# Altium PCB BM22192DA06_PCB.PcbDoc
Units mm, origin at the board's own origin, x right, y up, seen from the top; angles counter-clockwise.
Board outline 23.04 x 35.03 mm, 2 copper layers (Top Layer, Bottom Layer); 73 components, 45 nets, 223 pads, 62 vias.
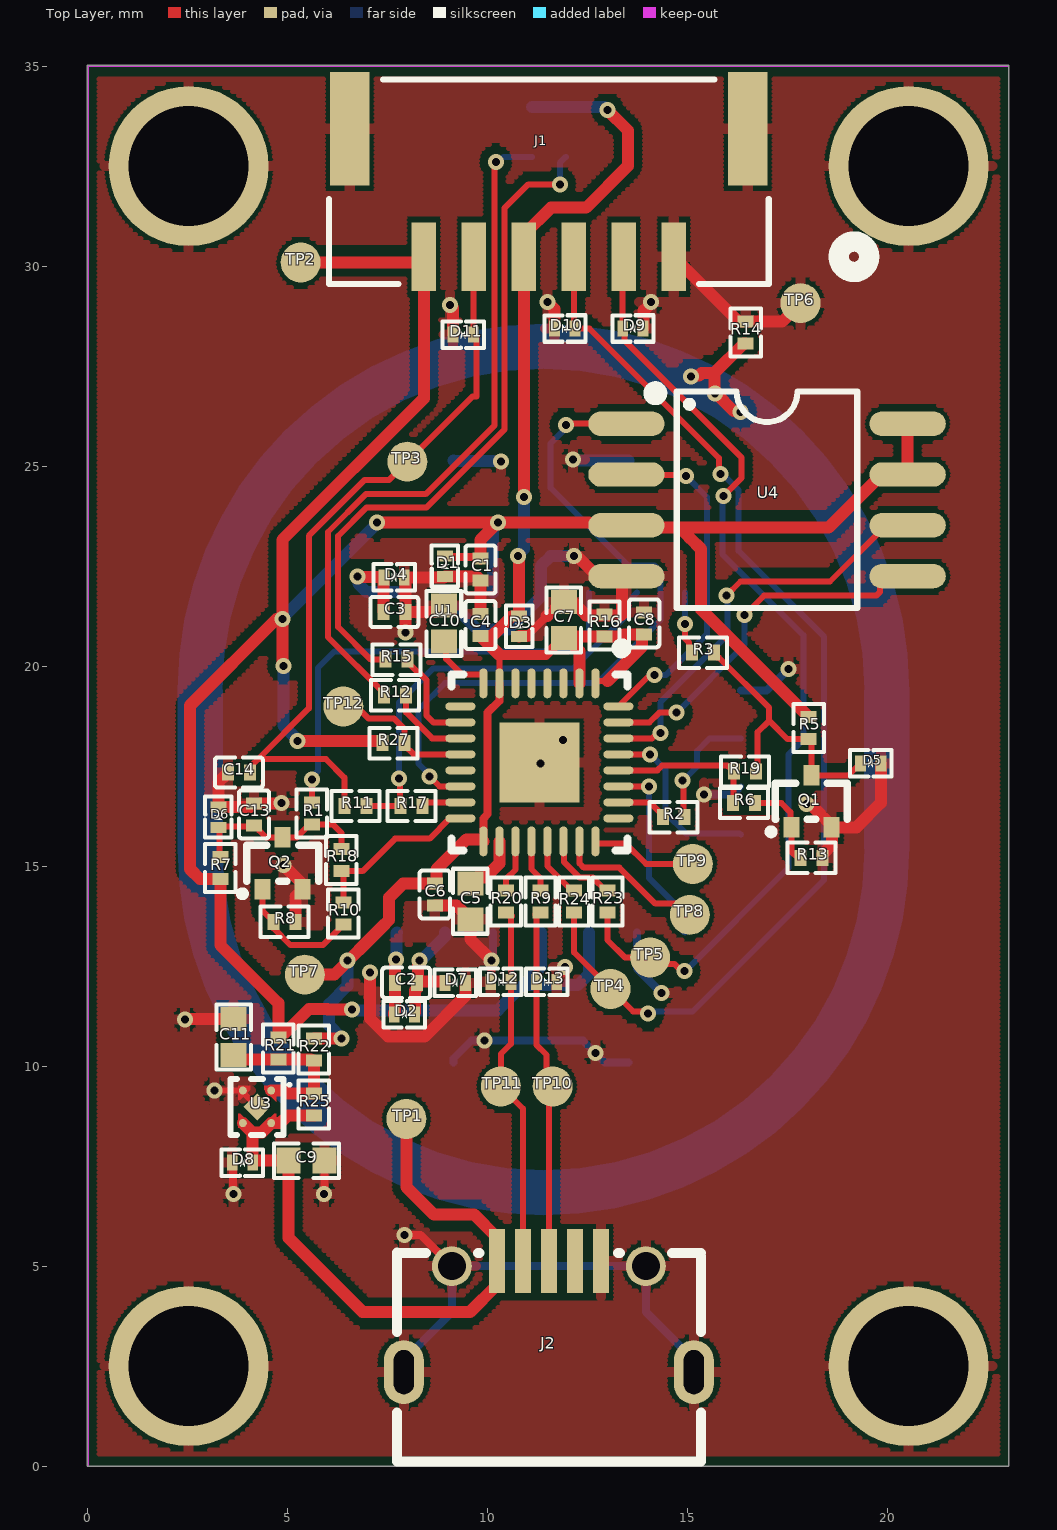
[diagram p0: Top Layer view]
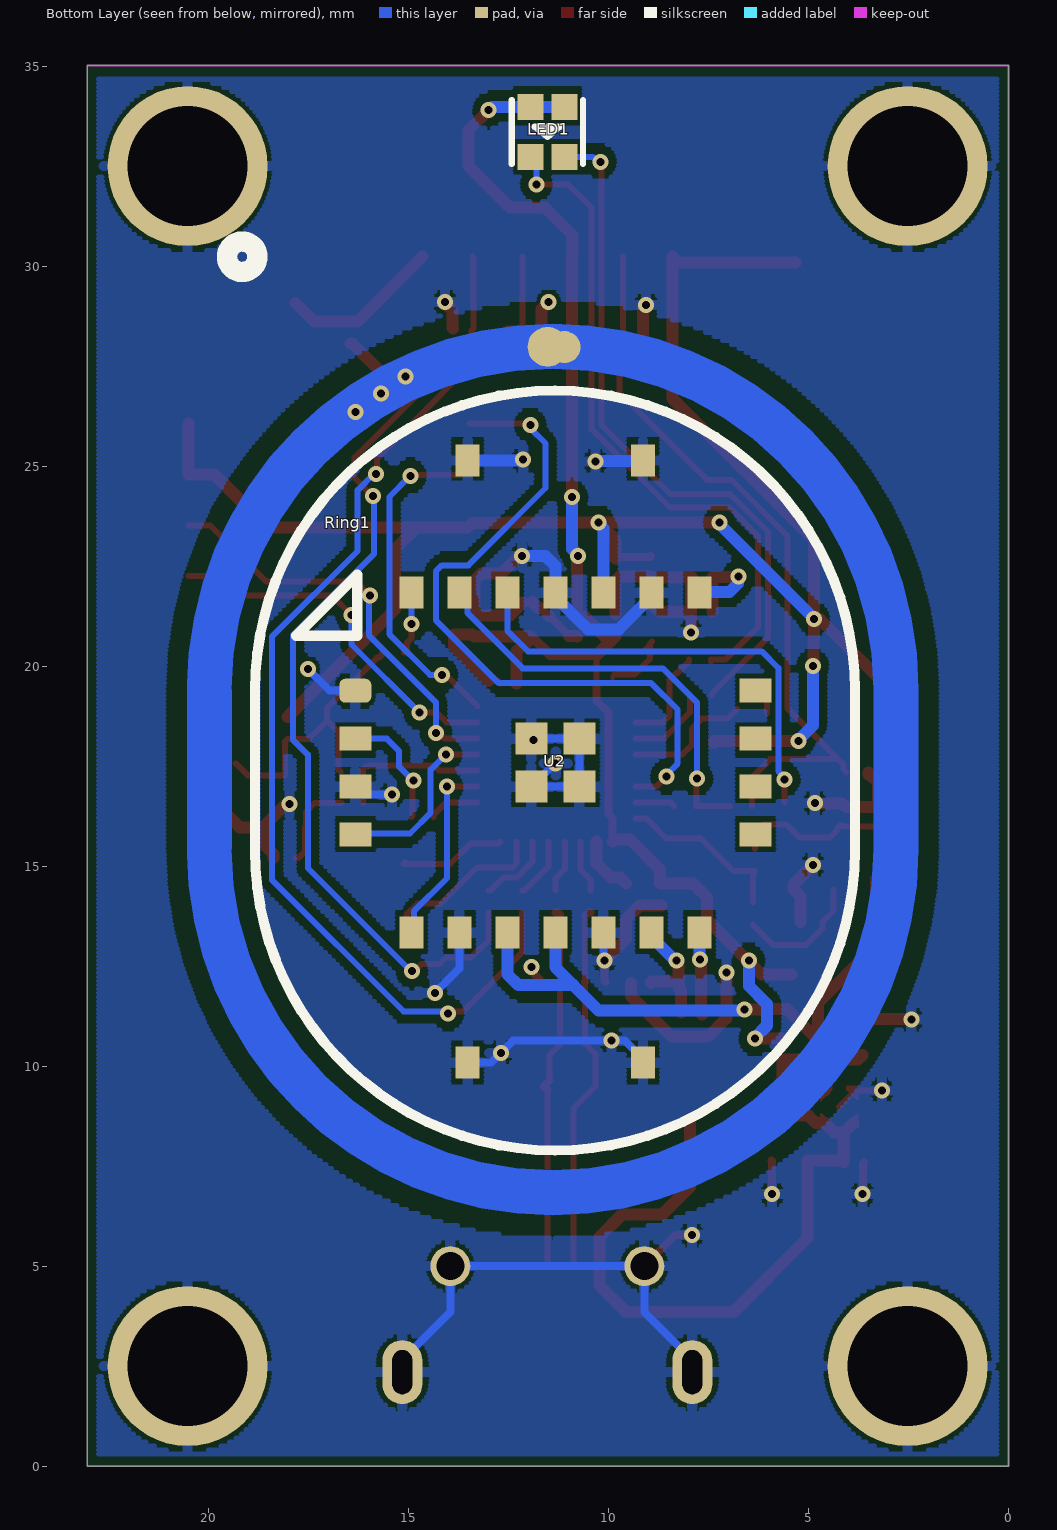
[diagram p1: Bottom Layer view, seen from below]

## Layer stack, top to bottom
Top Solder: solder mask 0.0102, Solder Resist, Dk 3.5
Top Layer: signal copper 0.0356
Dielectric 1: dielectric 0.32, FR-4, Dk 4.8
Bottom Layer: signal copper 0.0356
Bottom Solder: solder mask 0.0102, Solder Resist, Dk 3.5

## Board outline
0,0.001 0,35.028 23.038,35.028 23.038,0.001

## Design rules (kind name [scope] priority, off if disabled: settings)
BoardOutlineClearance [All] p1: gap=0 ignorepadtopadclearanceinfootprint=FALSE
Clearance Clearance_1 [All] p1: gap=0.1 ignorepadtopadclearanceinfootprint=FALSE except(0.2: Arc-Fill Arc-Poly Arc-Region Track-Fill Track-Poly Track-Region Via-Fill Via-Poly Via-Region Fill-Fill Fill-Poly Fill-Region Poly-Poly Poly-Region Region-Region)
Clearance "POUR POLYGON" [InNet('ESD_GND') vs InNet('GND')] p2: gap=0.5 ignorepadtopadclearanceinfootprint=FALSE
HoleSize [All] p1: absolutevalues=TRUE maxlimit=3 minlimit=0.025 maxpercent=80.000 minpercent=20.000
HoleToHoleClearance [All] p1: gap=0 allowstackedmicrovias=TRUE
MinimumSolderMaskSliver [All] p1: minsoldermaskwidth=0
PolygonConnect [All] p1: connectstyle=Relief reliefconductorwidth=0.254 reliefentries=4 polygonreliefangle="90 Angle" airgapwidth=0.1
RoutingCorners [All] p1: cornerstyle=45-Degree minsetback=1 maxsetback=1
RoutingVias [All] p1: holewidth=0.711 width=1.27 viastyle="Through Hole" minholewidth=0.711 minwidth=1.27 maxholewidth=0.711 maxwidth=1.27
SilkToSilkClearance [All] p1: silktosilkclearance=0
SilkToSolderMaskClearance [IsPad] p1: minsilkscreentomaskgap=0 clearancetoexposedcopper=TRUE
SolderMaskExpansion [All] p1: expansion=0.102 istentingtop=FALSE
Width [All] p1: maxlimit=1 minlimit=0.1 preferedwidth=0.15
24 further rules are at their usual default settings.

## Components (designator, comment, footprint, x,y, rotation, side; value= is the part's Value field where it differs from the comment)
C1 "2.2uF" C0201 9.83,22.424 r90 top
C2 "2.2uF" C0201 7.971,12.09 r0 top
C3 "2.2nF" C0201 7.675,21.361 r180 top
C4 "0.1uF" C0201 9.83,21.036 r270 top
C5 "1uF" C0402 9.576,14.13 r90 top
C6 "0.1uF" C0201 8.687,14.3 r90 top
C7 "4.7uF" C0402 11.913,21.158 r270 top
C8 "0.1uF" C0201 13.919,21.078 r270 top
C9 "1uF" C0402 5.479,7.645 r180 top
C10 "1uF" C0402 8.915,21.075 r270 top
C11 "1uF" C0402 3.658,10.737 r270 top
C13 "47nF" C0201 4.166,16.302 r270 top
C14 "NC" C0201 3.789,17.348 r0 top
D1 "5V" D0201-BI_A 8.94,22.509 r270 top
D2 "5V" D0201-BI_A 7.923,11.303 r0 top
D3 "TVS/5V" D0201-BI_A 10.795,21.004 r90 top
D4 "12V" D0201-BI_A 7.673,22.225 r180 top
D5 "5V" D0201-BI_A 19.588,17.577 r180 top
D6 "5V" D0201-BI_A 3.276,16.235 r270 top
D7 "12V" D0201-BI_A 9.199,12.091 r180 top
D8 "RSFK9D3NT" D0201-BI_A 3.875,7.594 r0 top
D9 "RSFK9D3NT" D0201-BI_A 13.642,28.448 r180 top
D10 "RSFK9D3NT" D0201-BI_A 11.94,28.448 r180 top
D11 "RSFK9D3NT" D0201-BI_A 9.4,28.296 r180 top
D12 "RSFK9D3NT" D0201-BI_A 10.336,12.115 r0 top
D13 "RSFK9D3NT" D0201-BI_A 11.485,12.116 r180 top
J1 "SM06B-GHS-TB(LF)(SN)" CONN_SM06B-GHS-TB_JST 11.536,32.119 r180 top locked
J2 "MICRO XNJ ZB" MICRO-USB-SMD_MICRO-XNJ-ZB 11.539,2.967 r270 top locked
LED1 "NCD1615RC1" LED-SMD_4P-L1.6-W1.5-TL-1 11.538,33.366 r90 bottom locked
Q1 "MMBT3904T" SOT-523-3_L1.6-W0.8-P1.00-LS1.6-BR 18.061,16.597 r270 top
Q2 "MMBT3904T" SOT-523-3_L1.6-W0.8-P1.00-LS1.6-BR 4.844,15.047 r270 top
R1 "Res1" R0201 5.613,16.328 r270 top value=1K
R2 "Res1" R0201 14.66,16.231 r180 top value=33R
R3 "Res1" R0201 15.392,20.345 r0 top value=1K
R5 "Res1" R0201 18.034,18.461 r270 top value=10K
R6 "Res1" R0201 16.413,16.586 r180 top value=2.2K
R7 "Res1" R0201 3.327,14.956 r90 top value=10K
R8 "Res1" R0201 4.932,13.614 r0 top value=10K
R9 "Res1" R0201 11.328,14.127 r90 top value=22R
R10 "Res1" R0201 6.401,13.818 r90 top value=2.2K
R11 "Res1" R0201 6.701,16.51 r0 top value=330R
R12 "Res1" R0201 7.696,19.279 r180 top value=100R
R13 "Res1" R0201 18.106,15.215 r0 top value=10K
R14 "Res1" R0201 16.459,28.346 r270 top value=0R
R15 "Res1" R0201 7.726,20.168 r0 top value=100R
R16 "Res1" R0201 12.929,21.027 r90 top value=10K
R17 "Res1" R0201 8.098,16.51 r180 top value=330R
R18 "Res1" R0201 6.35,15.159 r270 top value=NC
R19 "Res1" R0201 16.438,17.374 r180 top value=NC
R20 "Res1" R0201 10.465,14.118 r90 top value=22R
R21 "Res1" R0201 4.775,10.444 r90 top value=NC
R22 "Res1" R0201 5.664,10.419 r90 top value=NC
R23 "Res1" R0201 13.005,14.127 r90 top value=22R
R24 "Res1" R0201 12.167,14.118 r90 top value=22R
R25 "Res1" R0201 5.664,9.047 r90 top value=NC
R27 "Res1" R0201 7.65,18.085 r180 top value=10K
Ring1 "RING" 金属环 11.405,17.426 r0 top locked
TP1 "TestPoint" TestPoint 7.976,8.687 r180 top
TP2 "TestPoint" TestPoint 5.334,30.099 r270 top
TP3 "TestPoint" TestPoint 8.001,25.121 r270 top
TP4 "TestPoint" TestPoint 13.081,11.938 r90 top
TP5 "TestPoint" TestPoint 14.072,12.725 r90 top
TP6 "TestPoint" TestPoint 17.831,29.083 r90 top
TP7 "TestPoint" TestPoint 5.436,12.294 r270 top
TP8 "TestPoint" TestPoint 15.062,13.792 r270 top
TP9 "TestPoint" TestPoint 15.138,15.062 r270 top
TP10 "TestPoint" TestPoint 11.633,9.5 r270 top
TP11 "TestPoint" TestPoint 10.338,9.5 r270 top
TP12 "TestPoint" TestPoint 6.401,18.999 r90 top
U1 "CCM4201S" QFN40P400X400X85_HS-33N 11.303,17.602 r270 top locked
U2 "BF82192C" BF82192c 11.338,17.593 r0 top locked
U3 "ME6230C33U4AG" FBP4L_L1.0-W1.0-P0.65-BL-EP 4.293,8.992 r180 top
U4 "ZB25VQ32BSIG" SOIJ-8_L5.3-W5.3-P1.27-LS7.9-BL 16.993,24.181 r270 top locked

## Footprints (in the part's own frame and the unit in brackets; to place one, negate y for a bottom-side part, rotate by r counter-clockwise, add the part's x,y. Pads: shape width x height; smd on the part's side, far side on the other; paste and mask are expansions set on the pad)
BF82192c [mm] "FP_MODOULE"
  rrect50% 0.8x0.6 smd far side: 1(5,1.8)
  rect 0.8x0.6 smd far side: 2(5,0.6) 3(5,-0.6) 4(5,-1.8) 12(-5,-1.8) 13(-5,-0.6) 14(-5,0.6) 15(-5,1.8)
  rect 0.6x0.8 smd far side: 5(3.6,-4.25) 6(2.4,-4.25) 7(1.2,-4.25) 8(0,-4.25) 9(-1.2,-4.25) 10(-2.4,-4.25) 11(-3.6,-4.25) 16(-3.6,4.25) 17(-2.4,4.25) 18(-1.2,4.25) 19(0,4.25) 20(1.2,4.25) 21(2.4,4.25) 22(3.6,4.25) 27(-2.19,7.56) 28(2.19,7.56) 29(2.19,-7.5) 30(-2.19,-7.5)
  rect 0.8x0.8 smd far side: 23(0.6,0.6) 24(0.6,-0.6) 25(-0.6,-0.6) 26(-0.6,0.6)
C0201 [mm]
  rect 0.3x0.4 smd paste+0 mask+0.102: 1(-0.275,0) 2(0.275,0)
  silkscreen extent -0.6,-0.38 0.6,0.38
C0402 [mm]
  rect 0.6x0.65 smd paste+0 mask+0.051: 1(-0.45,0) 2(0.45,0)
  silkscreen extent -0.81,-0.43 0.81,0.43
CONN_SM06B-GHS-TB_JST [mil]
  rect 24x67 smd paste+0 mask+0: 1(-123.03,73.85) 2(-73.82,73.85) 3(-24.61,73.85) 4(24.61,73.85) 5(73.82,73.85) 6(123.03,73.85)
  rect 39x112 smd paste+0 mask+0: 7(-195.87,-52.14) 8(195.87,-52.14)
  silkscreen extent -315,-101 216,101
D0201-BI_A [mm]
  rect 0.27x0.4 smd paste+0 mask+0.05: 1(-0.252,0) 2(0.258,0)
  silkscreen extent -0.52,-0.33 0.52,0.33
FBP4L_L1.0-W1.0-P0.65-BL-EP [mm]
  round 0.2 smd mask+0: 1(-0.305,-0.406) 2(0.406,-0.406) 3(0.406,0.406) 4(-0.305,0.406)
  rect 0.48x0.48 smd rot 45 paste+0 mask+0.051: 5(0.048,0)
  Top Layer region: 0.523,-0.175 0.523,-0.525 0.223,-0.525 0.223,-0.525 0.223,-0.425 0.473,-0.175
  Top Layer region: -0.427,0.175 -0.427,0.525 -0.127,0.525 -0.127,0.475 -0.127,0.425 -0.377,0.175
  Top Layer region: 0.223,0.525 0.523,0.525 0.523,0.175 0.523,0.175 0.473,0.175 0.223,0.425
  Top Layer region: -0.127,-0.525 -0.427,-0.525 -0.427,-0.125 -0.427,-0.125 -0.127,-0.425
  silkscreen extent -0.78,-0.7 0.71,0.7
LED-SMD_4P-L1.6-W1.5-TL-1 [mm]
  rect 0.65x0.65 smd paste+0 mask+0.051: 1(-0.625,0.425) 2(0.625,0.425) 3(-0.625,-0.425) 4(0.625,-0.425)
  silkscreen extent -0.8,-0.89 0.8,0.89
MICRO-USB-SMD_MICRO-XNJ-ZB [mm]
  rect 1.6x0.4 smd paste-100 mask+0.051: 1(-2.167,-1.3) 2(-2.167,-0.65) 3(-2.167,0) 4(-2.167,0.65) 5(-2.167,1.3)
  round 1 hole 0.7 paste+0 mask+0.051: 6(-2.042,2.425) 6(-2.042,-2.425)
  oval 1.6x1 hole 0.5 slot 1.1 at 0 deg paste+0 mask+0.051: 6(0.608,3.625) 6(0.608,-3.625)
  silkscreen extent -2.38,-3.8 2.84,3.8
QFN40P400X400X85_HS-33N [mm] "QFN, 32-Leads, Body 4.00x4.00mm, Pitch 0.40mm, Thermal Pad 2.80x2.80mm, IPC Medium Density"
  oval 0.75x0.2 smd: 1(-1.975,1.4) 2(-1.975,1) 3(-1.975,0.6) 4(-1.975,0.2) 5(-1.975,-0.2) 6(-1.975,-0.6) 7(-1.975,-1) 8(-1.975,-1.4) 17(1.975,-1.4) 18(1.975,-1) 19(1.975,-0.6) 20(1.975,-0.2) 21(1.975,0.2) 22(1.975,0.6) 23(1.975,1) 24(1.975,1.4)
  oval 0.2x0.75 smd: 9(-1.4,-1.975) 10(-1,-1.975) 11(-0.6,-1.975) 12(-0.2,-1.975) 13(0.2,-1.975) 14(0.6,-1.975) 15(1,-1.975) 16(1.4,-1.975) 25(1.4,1.975) 26(1,1.975) 27(0.6,1.975) 28(0.2,1.975) 29(-0.2,1.975) 30(-0.6,1.975) 31(-1,1.975) 32(-1.4,1.975)
  rect 2x2 smd: 33(0,0)
  silkscreen extent -2.97,-2.2 2.2,2.2, body extent -2.05,-2.05 2.05,2.05, height 0.85
R0201 [mm]
  rect 0.3x0.4 smd paste+0 mask+0.102: 1(-0.275,0) 2(0.275,0)
  silkscreen extent -0.6,-0.38 0.6,0.38
SOIJ-8_L5.3-W5.3-P1.27-LS7.9-BL [mm]
  oval 0.609x1.907 smd paste+0 mask+0.051: 1(-1.888,-3.515) 2(-0.618,-3.515) 3(0.652,-3.515) 4(1.922,-3.515) 5(1.922,3.515) 6(0.652,3.515) 7(-0.618,3.515) 8(-1.888,3.515)
  silkscreen extent -2.8,-2.94 2.72,2.26
SOT-523-3_L1.6-W0.8-P1.00-LS1.6-BR [mm]
  rect 0.51x0.4 smd paste+0 mask+0.051: 1(0.62,-0.459) 2(0.62,0.541) 3(-0.68,0.041)
  silkscreen extent -0.48,-1.04 0.8,0.94
TestPoint [mm] "TP"
  round 1 smd: 1(0,0)
金属环 [mm]
  round 0.8 smd far side: 1(-0.295,10.559)
  round 1 smd far side mask+0: 1(0.127,10.566)
  Bottom Layer region: 0.896,-11.098 1.784,-10.966 2.654,-10.748 3.498,-10.446 4.309,-10.062 5.079,-9.601 5.8,-9.067 6.464,-8.464 7.067,-7.8 7.601,-7.079 8.062,-6.309 8.446,-5.498 8.748,-4.654 8.966,-3.784 9.098,-2.896 9.136,-2.126 9.139,-2 9.139,-2 9.139,-1.873 9.139,1.873 9.139,2 9.139,2 9.136,2.126 9.098,2.896 8.966,3.784 8.748,4.654 8.446,5.498 8.062,6.309 7.601,7.079 7.067,7.8 6.464,8.464 5.8,9.067 5.079,9.601 4.309,10.062 3.498,10.446 2.654,10.748 1.784,10.966 0.896,11.098 0,11.142 -0.896,11.098 -1.784,10.966 -2.654,10.748 -3.498,10.446 -4.309,10.062 -5.079,9.601 -5.8,9.067 -6.464,8.464 -7.067,7.8 -7.601,7.079 -8.062,6.309 -8.446,5.498 -8.748,4.654 -8.966,3.784 -9.098,2.896 -9.142,2.006 -9.139,2 -9.139,-2 -9.142,-2.006 -9.098,-2.896 -8.966,-3.784 -8.748,-4.654 -8.446,-5.498 -8.062,-6.309 -7.601,-7.079 -7.067,-7.8 -6.464,-8.464 -5.8,-9.067 -5.079,-9.601 -4.309,-10.062 -3.498,-10.446 -2.654,-10.748 -1.784,-10.966 -0.896,-11.098 0,-11.142 hole: 0,-10.019 -0.898,-9.969 -1.784,-9.818 -2.648,-9.569 -3.479,-9.225 -4.266,-8.79 -5,-8.269 -5.67,-7.67 -6.269,-7 -6.79,-6.266 -7.225,-5.479 -7.569,-4.648 -7.818,-3.784 -7.969,-2.898 -8.019,-2 -8.011,-2 -8.011,2 -8.019,2 -7.969,2.898 -7.818,3.784 -7.569,4.648 -7.225,5.479 -6.79,6.266 -6.269,7 -5.67,7.67 -5,8.269 -4.266,8.79 -3.479,9.225 -2.648,9.569 -1.784,9.818 -0.898,9.969 0,10.019 0.898,9.969 1.784,9.818 2.648,9.569 3.479,9.225 4.266,8.79 5,8.269 5.67,7.67 6.269,7 6.79,6.266 7.225,5.479 7.569,4.648 7.818,3.784 7.969,2.898 8.019,2 8.011,2 8.011,-2 8.019,-2 7.969,-2.898 7.818,-3.784 7.569,-4.648 7.225,-5.479 6.79,-6.266 6.269,-7 5.67,-7.67 5,-8.269 4.266,-8.79 3.479,-9.225 2.648,-9.569 1.784,-9.818 0.898,-9.969

## Part data
C1 C2 C3 C4 C6 C8 C13 C14: library part C0201, "CAP"
C5 C7 C9 C10 C11: library part C0201, Parameter 1=1uF
D1 D2 D3 D4 D5 D6 D7: library part RSFK9D3NT, "TVS"
D8: "TVS"
J1: library part SM06B-GHS-TBLFSN, "Description"
LED1: "LED"
Q1 Q2: "NPN triode"
R1 R2 R3 R5 R6 R7 R8 R9 R10 R11 R12 R13 R14 R15 R16 R17 R18 R19 R20 R21 R22 R23 R24 R25 R27: "Resistor", LatestRevisionDate=17-Jul-2002, LatestRevisionNote="Re-released for DXP Platform.", PackageDescription="Axial Device, Thru-Hole; 2 Leads; 0.3 in Pin Spacing", PackageReference=AXIAL-0.3, Published=8-Jun-2000, Publisher="Altium Limited"
Ring1: "Metal Ring"
U3: "LDO"

## Free pads (board coordinates)
  round 4 hole 3: 1(2.532,2.508) 1(2.532,32.508) 1(20.532,32.508)
  round 4 hole 3 mask+0.102: 1(20.532,2.508)

## Via types
v1: diameter 0.4, hole 0.2, Top Layer to Bottom Layer, tented both sides, 62 vias

## Nets (pads, with @x,y where several pads share a name; then routed paths per layer and width w, separated by ;. In a path a pad name is that pad's centre, name@x,y a point inside that pad or via, vN(x,y) a via of type N, cw(c..) or ccw(c..) an arc to the next point about the centre after c; other vN are vias at no path point)
+5: C9.2 D8.2 J2.1 R25.1 TP1.1 U3.3 U3.4 | length 17.6
  Top Layer w0.3: U3.3 4.118,8.354 ; D8.2 D8.2@4.133,7.63 ; R25.1 5.014,8.772 4.827,8.585 U3.4 4.366,8.354 4.118,8.354 ; TP1.1 7.976,6.985 8.661,6.299 9.673,6.299 10.239,5.733 J2.1 10.239,4.533 9.567,3.861 6.883,3.861 5.029,5.715 C9.2 4.149,7.645 D8.2@4.133,7.63 ; 4.118,8.354 4.133,8.338 D8.2@4.133,7.63
AVDD: C1.2 D1.1 J1.6 R5.1 R7.1 R21.2 R27.2 TP2.1 U2.7 U2.8 U2.18 U4.3 U4.7 U4.8 | length 71
  Top Layer w0.2: D1.1 8.962,22.739 9.789,22.739 C1.2
  Top Layer w0.3: v1(4.902,20.015) 4.883,20.034 4.883,20.661 4.877,20.668 v1(4.877,21.184) ; v1(5.255,18.139) 7.321,18.139 7.325,18.135 7.375,18.135 R27.2 ; TP2.1 8.267,30.099 J1.6 8.411,26.699 4.877,23.165 v1(4.877,21.184) ; v1(6.611,11.424) 6.009,11.424 6.002,11.43 5.536,11.43 4.825,10.719 R21.2 4.775,11.582 3.327,13.03 R7.1 2.819,14.681 2.565,14.935 2.565,19.025 4.724,21.184 v1(4.877,21.184) ; v1(7.239,23.597) v1(10.262,23.597) ; C1.2 9.83,23.165 v1(10.262,23.597) ; R5.1 17.984,18.736 17.984,18.786 15.342,21.429 15.342,22.936 15.062,23.216 15.06,23.216 14.806,23.469 ; U4.8 U4.7 19.858,24.798 18.529,23.469 14.806,23.469 ; v1(10.262,23.597) 12.542,23.597 12.551,23.588 13.418,23.588 13.537,23.469 14.806,23.469
  Bottom Layer w0.3: v1(4.877,21.184) 4.877,21.209 7.239,23.571 v1(7.239,23.597) ; v1(4.902,20.015) 4.902,18.518 5.255,18.166 v1(5.255,18.139) ; v1(6.611,11.424) 6.63,11.405 10.262,11.405 10.889,12.032 ; v1@10.135,23.444 10.138,23.441 U2.18 ; U2.8 11.338,12.481 10.889,12.032 ; U2.7 12.538,12.309 12.26,12.032 10.889,12.032
BOOT: R27.1 TP12.1 U1.12 | length 3.5
  Top Layer w0.15: TP12.1@6.045,18.821 TP12.1@6.045,19.101 ; TP12.1@6.795,18.934 7.034,18.694 7.671,18.694 7.925,18.44 R27.1 7.925,18.035 8.157,17.802 U1.12
DM: D12.2 J2.2 R20.1 TP11.1 | length 9.1
  Top Layer w0.15: D12.2@10.592,12.114 10.592,10.566 10.338,10.312 TP11.1 10.889,8.949 J2.2 ; D12.2 R20.1@10.594,13.764
  Top Layer w0.2: R20.1 10.515,13.843 R20.1@10.594,13.764 ; D12.2@10.592,12.114 D12.2
DM_1: R20.2 U1.19 | length 1.3
  Top Layer w0.15: R20.2 10.465,14.681 10.703,14.919 U1.19
DP: D13.2 J2.3 R9.1 TP10.1 | length 9
  Top Layer w0.15: R9.1@11.227,13.8 D13.2 11.227,10.541 11.48,10.288 TP10.1@11.48,9.653 ; J2.3 TP10.1@11.539,9.405
  Top Layer w0.2: R9.1@11.227,13.8 11.278,13.852 R9.1 ; TP10.1@11.48,9.653 TP10.1 TP10.1@11.539,9.405
DP_1: R9.2 U1.20 | length 1.3
  Top Layer w0.15: U1.20 11.1,15.624 11.1,14.935 11.328,14.707 R9.2
ESD_GND: R14.2 Ring1.1 | length 3.1
  Top Layer w0.3: v1(15.088,27.254) 15.107,27.273 15.294,27.273 15.351,27.33 15.668,27.33 ; v1(16.332,26.365) 16.313,26.384 16.162,26.384 15.724,26.822 v1(15.697,26.822) 15.678,26.842 15.678,27.32 15.668,27.33 ; R14.2 16.409,28.072 15.668,27.33
FP_INT: R11.2 R17.2 U2.21 | length 10.7
  Top Layer w0.15: R11.2 R17.2 7.81,16.523 7.81,17.183 v1(7.798,17.196)
  Bottom Layer w0.15: v1(7.798,17.196) 7.798,19.101 8.649,19.952 12.154,19.952 13.532,21.33 13.532,21.637 U2.21
FP_RST: C13.2 D6.2 Q2.3 R1.2 R7.2 R18.1 | length 4.6
  Top Layer w0.15: R7.2 3.302,15.256 3.302,15.951 D6.2 3.302,16.002 4.14,16.002 C13.2 4.216,16.027 4.291,15.952 4.291,15.902 4.466,15.727 Q2.3 5.238,15.727 5.563,16.053 6.135,16.053 6.35,15.838 R18.1
FP_RST_MCU: R10.2 R18.2 U1.16 | length 4.3
  Top Layer w0.15: R10.2 6.401,14.834 R18.2 6.883,14.884 7.696,15.697 8.56,15.697 9.065,16.202 U1.16
FVDD: C2.1 D2.1 U2.11 | length 2.1
  Top Layer w0.3: D2.1 7.671,11.338 7.696,11.363 7.696,12.622 7.723,12.649 v1(7.723,12.676)
  Bottom Layer w0.3: v1(7.723,12.676) 7.73,12.683 7.73,13.335 U2.11
FVSS: C2.2 D2.2 D7.2 U2.10 | length 3
  Top Layer w0.3: D2.2@8.196,11.353 8.196,11.462 8.197,11.463 8.197,11.904 8.246,11.953 C2.2@8.246,12.074 ; C2.2 8.246,12.124 8.926,12.124 8.941,12.109 D7.2 ; C2.2@8.246,12.107 8.246,12.228 8.262,12.245 8.262,12.535 8.287,12.559 8.287,12.63 v1(8.306,12.649)
  Bottom Layer w0.3: v1(8.306,12.649) 8.325,12.668 8.364,12.668 8.938,13.243 U2.10
G-: LED1.3 R12.2 | length 17.5
  Top Layer w0.15: R12.2 7.421,19.329 6.016,20.734 6.016,23.362 6.961,24.307 8.459,24.307 10.181,26.029 10.181,32.584 v1(10.211,32.614)
  Bottom Layer w0.15: v1(10.211,32.614) 10.278,32.614 10.405,32.741 LED1.3
GND: C1.1 C3.1 C4.1 C5.1 C6.1 C7.1 C8.1 C9.1 C10.1 C11.1 C13.1 C14.1 D1.2 D3.1 D4.1 D5.1 D6.1 D7.1 D8.1 D9.1 D10.2 D11.2 D12.1 D13.1 J1.1 J1.7 J1.8 J2.5 J2.6 pad.1 Q1.2 Q2.2 R8.2 R13.2 R14.1 R16.2 TP6.1 U1.33 U2.1 U2.3 U2.6 U2.9 U2.17 U2.19 U2.23 U2.24 U2.25 U2.26 U2.27 U2.28 U2.29 U2.30 U3.2 U3.5 U4.4 | length 71.4
  Top Layer w0.15: v1(3.175,9.398) U3.2 3.896,9.388 3.896,9.34 U3.5
  Top Layer w0.2: D8.1 3.64,7.577 3.64,6.824 v1(3.658,6.807) ; v1(5.918,6.807) 5.924,6.813 5.924,7.64 C9.1 ; v1(7.925,5.791) 8.331,5.791 J2.6@9.114,5.008 ; D12.1 10.109,12.141 v1(10.109,12.649) ; D3.1@10.993,20.767 11.484,21.258 ; 11.506,21.258 C7.1@11.706,21.458 ; D13.1 11.737,12.181 11.9,12.344 11.9,12.443 v1(11.938,12.482)
  Top Layer w0.3: v1(2.438,11.176) 2.45,11.187 C11.1 ; C14.1 3.514,17.298 3.473,17.298 3.277,17.101 D6.1 4.075,16.486 C13.1 4.842,16.577 v1(4.851,16.586) ; v1(4.902,15.037) 5.385,14.554 Q2.2 5.207,14.249 R8.2 ; v1(7.061,12.344) 7.061,11.201 7.518,10.744 8.433,10.744 9.451,11.762 D7.1 ; v1(7.95,20.853) C3.1 ; C6.1 9.23,14.025 C5.1 9.576,13.183 v1(10.109,12.649) ; C10.1 8.89,21.525 8.727,21.361 C3.1 ; v1(9.068,29.032) 9.142,28.958 D11.2 ; C4.1 C1.1 9.728,22.25 D1.2 8.915,22.225 D4.1 7.95,22.2 C3.1 ; D3.1 10.81,20.767 D3.1@10.993,20.767 ; 11.484,21.258 11.506,21.258 ; v1(11.506,29.108) 11.682,28.932 D10.2 ; C7.1@11.706,21.458 11.763,21.458 C7.1 ; v1@12.132,25.162 v1(12.141,25.171) ; C7.1@12.146,21.601 12.471,21.276 13.335,21.276 13.36,21.302 13.36,22.141 13.184,22.318 12.686,22.318 12.264,22.739 12.186,22.739 v1(12.167,22.758) ; D9.1 13.909,28.463 13.909,28.893 14.097,29.081 v1(14.097,29.108) ; J1.1 16.283,28.621 R14.1 17.369,28.621 TP6.1 ; v1(17.983,16.561) 18.002,16.542 18.092,16.542 18.602,16.032 Q1.2 ; R13.2 18.381,15.307 18.618,15.545 18.618,15.961 Q1.2 ; D5.1 19.839,16.588 19.228,15.977 Q1.2
  Bottom Layer w0.15: J2.6@7.914,2.358 J2.6@7.914,2.658 ; v1(12.141,25.171) v1@12.16,25.153 ; J2.6@15.164,2.358 J2.6@15.164,2.658 ; U2.3@16.258,16.912 U2.3
  Bottom Layer w0.2: J2.6@7.914,2.658 9.114,3.858 9.114,5.008 13.964,5.008 13.964,3.858 J2.6@15.164,2.658 ; U2.30 9.148,10.193 9.598,10.643 12.395,10.643 v1(12.7,10.338) 12.945,10.093 U2.29 ; v1(10.109,12.649) 10.138,12.678 U2.9 ; v1@11.303,17.577 v1(11.328,17.577) 11.354,17.577 U2.24 U2.25 U2.26 U2.23 ; U2.6 13.738,12.449 v1(14.351,11.836) ; v1(15.419,16.793) 16.139,16.793 U2.3@16.258,16.912 ; U2.1 16.98,19.393 v1(17.526,19.939)
  Bottom Layer w0.3: U2.17 8.938,21.743 9.751,20.93 10.516,20.93 10.592,21.006 10.601,21.006 11.338,21.743 U2.19 11.338,22.514 11.582,22.758 v1(12.167,22.758) ; U2.27 9.164,25.137 10.322,25.137 v1(10.338,25.121) ; v1@12.16,25.153 U2.28
  other v1: 9.931,10.643 11.887,18.161
HVDD: C3.2 D4.2 U2.16 | length 2.8
  Top Layer w0.2: C3.2 C3.2@7.408,21.369 ; D4.2@7.408,22.218 D4.2
  Top Layer w0.3: v1(6.756,22.25) 6.769,22.238 7.402,22.238 D4.2 ; C3.2@7.408,21.369 D4.2@7.408,22.218
  Bottom Layer w0.2: U2.16@7.737,21.844 U2.16
  Bottom Layer w0.3: v1(6.756,22.25) 6.776,22.231 6.776,22.068 6.988,21.856 7.725,21.856 U2.16@7.737,21.844
INT_OUT: C14.2 D11.1 J1.5 R11.1 TP3.1 | length 18.8
  Top Layer w0.15: C14.2 4.139,17.423 4.139,17.553 4.267,17.681 ; R11.1 6.426,17.221 5.966,17.681 4.267,17.681 ; J1.5 9.652,30.234 D11.1 9.728,28.219 9.728,26.746 9.627,26.746 TP3.1 7.544,24.663 6.934,24.663 5.537,23.266 5.537,18.951 4.267,17.681
LED_G: R12.1 U1.11 | length 2.1
  Top Layer w0.15: R12.1 7.971,18.851 8.62,18.202 U1.11
LED_R: R15.2 U1.10 | length 2.5
  Top Layer w0.15: R15.2 8.001,20.118 8.288,19.83 8.313,19.83 8.484,19.66 8.484,18.771 8.652,18.602 U1.10
M_CLK: U1.30 U4.6 | length 10.5
  Top Layer w0.15: U1.30 14.117,18.202 14.256,18.341 v1(14.323,18.341) ; v1(15.977,21.768) 15.977,21.772 16.328,22.123 18.567,22.123 19.972,23.528 U4.6
  Bottom Layer w0.15: v1(14.323,18.341) 14.323,19.103 16.002,20.782 16.002,21.742 v1(15.977,21.768)
M_CS: U1.14 U4.1 | length 17.7
  Top Layer w0.15: v1(8.56,17.247) 8.804,17.002 U1.14 ; v1(11.963,26.035) 11.997,26.068 U4.1
  Bottom Layer w0.15: v1(8.56,17.247) 8.56,17.289 8.28,17.568 8.28,17.674 8.28,18.923 8.941,19.583 12.751,19.583 14.326,21.158 14.326,22.377 14.173,22.53 13.513,22.53 11.582,24.46 11.582,25.578 11.963,25.959 v1(11.963,26.035)
M_MISO: U1.32 U4.2 | length 8.6
  Top Layer w0.15: U1.32 14.062,19.787 v1(14.173,19.787) ; U4.2 13.494,24.782 14.944,24.782 v1(14.961,24.765)
  Bottom Layer w0.15: v1(14.173,19.787) 14.177,19.791 14.47,19.791 15.49,20.81 15.49,24.236 v1(14.961,24.765)
M_MOSI: U1.31 U4.5 | length 9.3
  Top Layer w0.15: U1.31 14.054,18.602 14.299,18.847 v1(14.732,18.847) ; v1(16.434,21.285) 16.916,21.768 19.724,21.768 19.812,21.856 19.812,22.046 20.024,22.258 U4.5
  Bottom Layer w0.15: v1(14.732,18.847) 16.434,20.549 v1(16.434,21.285)
MCU_3V3: C4.2 C6.2 C7.2 C8.2 D3.2 J1.4 LED1.2 LED1.4 R16.1 R22.2 TP7.1 U1.1 U1.2 U1.7 U1.17 | length 39.2
  Top Layer w0.15: U1.7 10.303,20.288 ; C7.2@11.931,20.752 C7.2@11.956,20.752 ; U1.1 12.76,19.634 13.005,19.634
  Top Layer w0.2: U1.17 9.903,16.202 10.008,16.307 10.008,18.847 10.303,19.142 U1.7
  Top Layer w0.25: 10.303,20.288 11.467,20.288 C7.2@11.931,20.752
  Top Layer w0.3: TP7.1 5.439,12.297 6.176,12.297 7.366,13.487 7.368,13.487 7.544,13.663 7.544,14.224 7.895,14.575 C6.2 ; R22.2 v1(6.35,10.693) ; C6.2@8.725,14.575 8.725,14.923 9.479,15.676 9.854,15.676 U1.17 ; 10.303,20.288 C4.2 10.118,20.761 10.345,20.988 10.345,20.99 D3.2@10.601,21.247 ; v1(10.77,22.758) 10.795,22.733 D3.2 ; v1(10.922,24.232) 10.917,24.237 10.917,30.238 J1.4 10.911,30.789 11.593,31.471 12.471,31.471 13.513,32.512 13.513,33.401 v1(13.005,33.909) ; C7.2@11.956,20.689 12.088,20.558 12.127,20.558 12.303,20.382 U1.2 ; C7.2@11.956,20.752 R16.1 13.36,20.752 13.411,20.803 13.869,20.803 13.869,20.499 13.005,19.634
  Bottom Layer w0.3: v1(6.35,10.693) 6.35,10.72 6.045,11.025 6.045,11.557 6.502,12.014 v1(6.502,12.649) ; v1(10.77,22.758) 10.77,22.785 10.922,22.938 v1(10.922,24.232) ; LED1.4 LED1.2 12.923,33.991 v1(13.005,33.909)
MCU_INT: R17.1 U1.15 | length 1
  Top Layer w0.15: R17.1 8.373,16.527 8.448,16.602 U1.15
NetQ1_1: Q1.1 R6.1 R13.1 | length 2.3
  Top Layer w0.15: R6.1 17.348,16.586 17.577,16.358 17.577,16.002 Q1.1 17.602,15.367 17.755,15.215 R13.1
NetQ2_1: Q2.1 R8.1 R10.1 | length 3.2
  Top Layer w0.15: Q2.1 4.385,13.887 R8.1 4.657,13.453 5.08,13.03 5.888,13.03 R10.1
NSS: R3.1 U2.22 | length 1.6
  Top Layer w0.15: v1(14.938,21.059) 14.938,20.698 15.042,20.594 15.042,20.42 R3.1
  Bottom Layer w0.15: v1@14.935,21.057 v1(14.938,21.059) U2.22
R-: LED1.1 R15.1 | length 17
  Top Layer w0.15: R15.1@7.451,20.118 R15.1 7.087,20.168 6.266,20.988 6.266,23.258 6.985,23.978 8.484,23.978 10.431,25.925 10.431,31.463 11.024,32.055 v1(11.811,32.055)
  Bottom Layer w0.15: v1(11.811,32.055) 11.811,32.588 LED1.1
RSTN: R1.1 U2.20 | length 11.5
  Top Layer w0.15: R1.1 v1(5.613,17.17)
  Bottom Layer w0.15: v1(5.613,17.17) 5.613,17.234 5.763,17.383 5.763,19.962 6.178,20.377 12.02,20.377 12.538,20.895 U2.20
RXD2: D9.2 J1.2 R23.1 TP5.1 | length 24.3
  Top Layer w0.15: R23.1 13.005,13.157 13.437,12.725 TP5.1 14.234,12.563 14.675,12.563 14.856,12.381 v1(14.924,12.381) ; J1.2 13.384,30.216 D9.2 13.434,28.397 13.434,28.145 16.358,25.222 16.358,24.714 v1(15.9,24.257)
  Bottom Layer w0.15: v1(14.924,12.381) 14.946,12.381 17.526,14.961 17.526,17.797 17.901,18.172 17.901,20.783 15.875,22.809 15.875,24.232 v1(15.9,24.257)
RXD_2: R23.2 U1.22 | length 1.9
  Top Layer w0.15: U1.22 11.913,15.618 11.913,15.115 12.31,14.718 12.639,14.718 12.955,14.402 R23.2
SCK1: R2.2 U1.26 | length 1.3
  Top Layer w0.15: U1.26 14.064,16.602 14.385,16.281 R2.2
SPI_CLK: R2.1 U2.2 | length 3.1
  Top Layer w0.15: v1(14.884,17.145) 14.91,17.12 14.91,16.256 R2.1
  Bottom Layer w0.15: v1(14.884,17.145) 14.892,17.145 15.242,17.495 15.242,17.883 15.551,18.193 U2.2
SPI_CS: R6.2 R19.2 U1.28 | length 3.8
  Top Layer w0.15: U1.28 14.249,17.402 14.367,17.52 16.001,17.52 16.022,17.499 16.088,17.499 16.163,17.424 R19.2 16.151,17.361 16.151,16.599 R6.2
SPI_MISO: U1.29 U2.4 | length 4.5
  Top Layer w0.15: U1.29 v1(14.068,17.802) v1@14.072,17.805
  Bottom Layer w0.15: v1(14.068,17.802) 14.453,17.418 14.453,16.344 14.972,15.824 16.306,15.824 U2.4
SPI_MOSI: U1.27 U2.5 | length 4.8
  Top Layer w0.15: U1.27 14.037,17.002 v1(14.046,16.993)
  Bottom Layer w0.15: v1(14.046,16.993) 14.046,14.707 14.873,13.88 14.873,13.408 U2.5
SPI_NSS: D5.2 Q1.3 R3.2 R5.2 R19.1 | length 7.2
  Top Layer w0.15: R3.2 15.667,20.295 15.742,20.22 15.792,20.22 17.043,18.969 17.043,18.644 ; R19.1 16.755,17.415 16.755,18.355 17.043,18.644 ; D5.2 19.029,17.277 Q1.3 18.102,18.118 R5.2 17.501,18.186 17.043,18.644
TCK: TP8.1 U1.23 | length 3.8
  Top Layer w0.15: U1.23 12.303,15.078 12.413,14.968 12.858,14.968 13.302,14.968 14.199,14.072 14.783,14.072 TP8.1
TDO: TP9.1 U1.24 | length 2.7
  Top Layer w0.15: U1.24 12.76,15.57 13.462,15.57 13.97,15.062 TP9.1 TP9.1@15.088,15.113
TXD2: D10.1 J1.3 R24.1 TP4.1 | length 27.7
  Top Layer w0.15: J1.3 12.161,28.455 D10.1@12.168,28.448 ; R24.1 12.167,12.852 13.643,11.376 13.973,11.376 v1(14.021,11.328) ; D10.1 12.552,28.448 15.79,25.21 15.79,24.85 v1(15.824,24.816)
  Bottom Layer w0.15: v1(14.021,11.328) 14.065,11.372 15.132,11.372 18.415,14.656 18.415,17.688 18.415,20.752 16.281,22.885 16.281,24.406 15.872,24.816 v1(15.824,24.816)
TXD_2: R24.2 U1.21 | length 1.5
  Top Layer w0.15: U1.21 11.503,15.006 12.117,14.393 R24.2
VDD: C10.2 U1.8 | length 2.1
  Top Layer w0.1: C10.2 C10.2@9.144,20.396 ; U1.8@9.857,19.802 9.903,19.756 U1.8
  Top Layer w0.15: C10.2 8.972,20.569 8.972,20.188 9.357,19.802 U1.8@9.857,19.802
VDD_3V3: C11.2 R21.1 R22.1 R25.2 U3.1 | length 4
  Top Layer w0.3: C11.2 3.776,10.169 R21.1 5.589,10.169 5.614,10.144 R22.1 R25.2 5.014,9.322 4.938,9.398 U3.1
VDDA: C5.2 U1.18 | length 1.5
  Top Layer w0.3: C5.2 9.726,14.73 9.954,14.73 10.303,15.078 U1.18
pads on no net: J2.4 U1.3 U1.4 U1.5 U1.6 U1.9 U1.13 U1.25 U2.12 U2.13 U2.14 U2.15

## Polygon pours and split planes (outlines as drawn)
GND on Top Layer "GND_L01_P000" (hatched Horizontal grid 0.102 track 0.127, remove dead copper, pour order 0): 0,0 0,35.001 23.006,35.001 23.006,0
GND on Bottom Layer "GND_L02_P001" (hatched Horizontal grid 0.102 track 0.127, remove dead copper, pour order 1): 0,0 0,35.001 23.006,35.001 23.006,0

## Keep-outs
Keep-Out Layer:
  lines w0.013: 23.032,0.006 0.025,0.006 0.025,35.008 23.032,35.008 23.032,0.008

## Silkscreen, mask and mechanical layers (free items; w line width, h text height)
Mechanical 1:
  circle w0.013: c20.532,2.508 r1.5
  circle w0.013: c20.532,2.508 r2
  circle w0.013: c2.532,2.508 r2
  circle w0.013: c2.532,2.508 r1.5
  circle w0.013: c2.532,32.508 r1.5
  circle w0.013: c2.532,32.508 r2
  circle w0.013: c20.532,32.508 r2
  circle w0.013: c20.532,32.508 r1.5
  lines w0.013: 6.129,31.638 6.636,31.638 6.636,31.131 ; 6.129,35.008 6.129,30.931 6.219,30.931 6.419,31.185 6.419,31.638 ; 6.428,30.986 6.627,30.986 ; 6.428,31.484 6.627,31.484 ; 6.428,31.638 6.428,30.832 6.627,30.832 6.627,31.638 ; 7.034,30.931 7.034,31.131 6.636,31.131 ; 8.294,30.243 8.493,30.243 ; 8.294,30.687 8.493,30.687 ; 8.294,30.941 8.493,30.941 ; 8.294,31.031 8.493,31.031 ; 8.294,31.076 8.493,31.076 ; 8.294,31.085 8.294,30.125 8.493,30.125 8.493,31.085 ; 9.544,30.243 9.743,30.243 ; 9.544,30.687 9.743,30.687 ; 9.544,30.941 9.743,30.941 ; 9.544,31.031 9.743,31.031 ; 9.544,31.076 9.743,31.076 ; 9.544,35.008 16.935,35.008 16.935,30.931 16.844,30.931 16.645,31.185 16.645,31.638 ; 9.743,31.085 9.743,30.125 9.544,30.125 9.544,31.085 ; 10.803,30.243 11.002,30.243 ; 10.803,30.687 11.002,30.687 ; 10.803,30.941 11.002,30.941 ; 10.803,31.031 11.002,31.031 ; 10.803,31.076 11.002,31.076 ; 10.803,31.085 10.803,30.125 11.002,30.125 11.002,31.085 ; 11.532,30.125 11.532,35.008 ; 12.062,30.243 12.261,30.243 ; 12.062,30.687 12.261,30.687 ; 12.062,30.941 12.261,30.941 ; 12.062,31.031 12.261,31.031 ; 12.062,31.076 12.261,31.076 ; 12.062,31.085 12.062,30.125 12.261,30.125 12.261,31.085 ; 13.312,30.243 13.52,30.243 ; 13.312,30.687 13.52,30.687 ; 13.312,30.941 13.52,30.941 ; 13.312,31.031 13.52,31.031 ; 13.312,31.076 13.52,31.076 ; 13.312,31.085 13.312,30.125 13.52,30.125 13.52,31.085 ; 14.571,30.243 14.779,30.243 ; 14.571,30.687 14.779,30.687 ; 14.571,30.941 14.779,30.941 ; 14.571,31.031 14.779,31.031 ; 14.571,31.076 14.779,31.076 ; 14.571,31.085 14.571,30.125 14.779,30.125 14.779,31.085 ; 15.25,35.008 15.576,34.355 15.902,35.008 ; 16.029,30.931 16.029,31.131 16.428,31.131 ; 16.437,30.986 16.636,30.986 ; 16.437,31.484 16.636,31.484 ; 16.437,31.638 16.437,30.832 16.636,30.832 16.636,31.638 ; 16.935,31.638 16.428,31.638 16.428,31.131 ; 6.636,31.131 6.844,30.931 7.614,30.931 7.614,31.085 9.544,31.085 ; 9.544,31.085 15.458,31.085 15.458,30.931 16.219,30.931 16.428,31.131 ; 7.782,0.147 7.782,5.227 15.282,5.227 15.282,0.147 7.782,0.147